# Altium PCB HX-SMJ-03-A.pcbdoc (part 2 of 2)
Units mil, origin at the board's own origin, x right, y up, seen from the top; angles counter-clockwise.
Board outline 10466.23 x 2984.91 mil, 2 copper layers (Top Layer, Bottom Layer); 269 components, 182 nets, 710 pads, 382 vias.
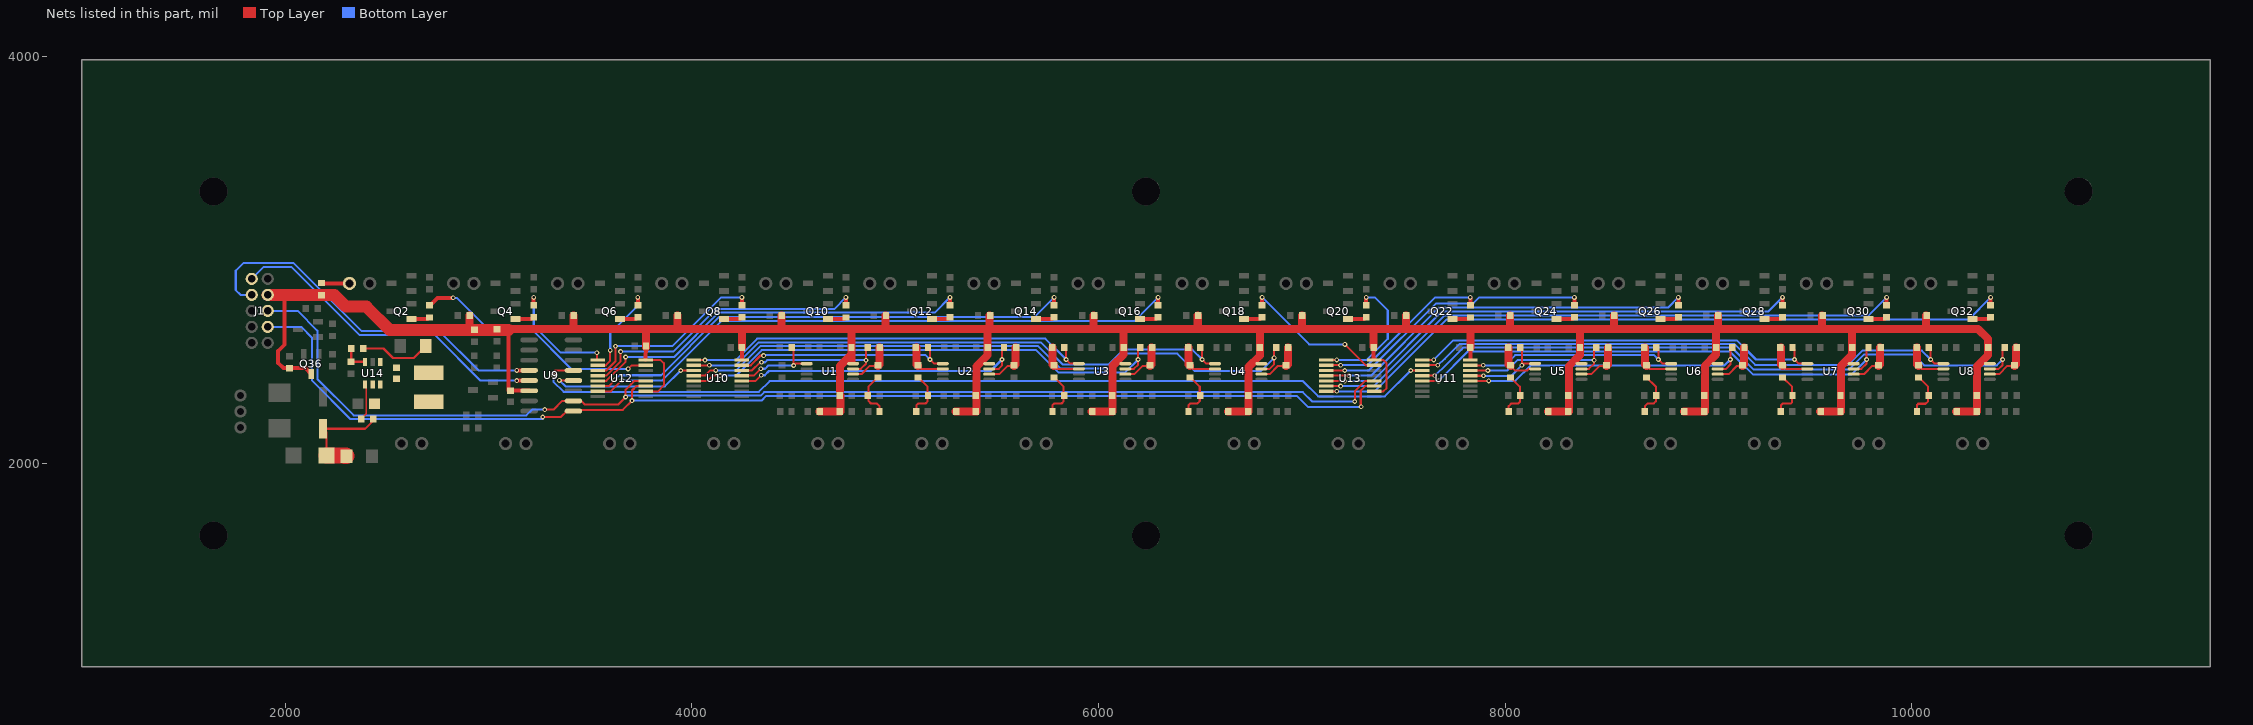
[diagram p2: the nets of this part, all layers, seen from the top]

## Via types
v1: diameter 24, hole 12, Top Layer to Bottom Layer, 370 vias
v2: diameter 27.56, hole 15.75, Top Layer to Bottom Layer, 12 vias

## Nets (pads, with @x,y where several pads share a name; then routed paths per layer and width w, separated by ;. In a path a pad name is that pad's centre, name@x,y a point inside that pad or via, vN(x,y) a via of type N, cw(c..) or ccw(c..) an arc to the next point about the centre after c; other vN are vias at no path point) (continued)
R5_1: C3.1 R5.1 R9.2 | length 227.8
  Top Layer w10: R5.1@4914.73,2425.32 4867.53,2378.12 4867.53,2334.72 4867.53,2308.42 4880.63,2295.32 4908.23,2295.32 4922.63,2280.92 C3.1@4922.59,2256.02
R6_1: R5.2 R6.1 U1.6 | length 237.5
  Top Layer w10: U1.6@4787.73,2440.12 4833.73,2440.12 4874.13,2480.42 R5.2@4914.73,2480.42
  Top Layer w39.37: R5.2@4914.73,2480.42 4922.63,2488.32 R6.1@4922.63,2571.02
R18_2: C6.2 R14.2 R18.2 | length 232.7
  Top Layer w10: C6.2@5103.73,2256.02 5103.73,2286.72 5112.53,2295.52 5148.53,2295.52 5158.83,2305.92 5158.83,2334.82 5158.83,2378.12 R14.2@5111.63,2425.32
R28_2: C10.2 R24.2 R28.2 | length 232.2
  Top Layer w10: C10.2@5773.03,2256.02 5773.03,2286.02 5782.53,2295.52 5817.53,2295.52 5828.13,2306.12 5828.13,2334.72 5828.13,2378.12 R24.2@5780.93,2425.32
R38_2: C14.2 R34.2 R38.2 | length 232
  Top Layer w10: C14.2@6442.28,2256.02 6442.33,2286.32 6451.33,2295.22 6485.93,2295.22 6497.43,2306.72 6497.43,2334.72 6497.43,2378.12 R34.2@6450.23,2425.32
R48_2: C18.2 R44.2 R48.2 | length 232.2
  Top Layer w10: C18.2@8017.13,2256.02 8017.13,2282.82 8029.53,2295.22 8064.53,2295.22 8072.23,2302.92 8072.23,2334.72 8072.23,2378.12 R44.2@8025.03,2425.32
R58_2: C22.2 R54.2 R58.2 | length 229.3
  Top Layer w10: C22.2@8686.38,2256.02 8686.43,2282.12 8700.53,2296.22 8730.53,2296.22 8741.53,2307.22 8741.53,2334.72 8741.53,2378.12 R54.2@8694.23,2425.32
R68_2: C26.2 R64.2 R68.2 | length 234.1
  Top Layer w10: C26.2@9355.63,2256.02 9355.63,2285.42 9365.53,2295.22 9403.53,2295.22 9410.83,2302.52 9410.83,2334.82 9410.83,2378.12 R64.2@9363.53,2425.32
R78_2: C30.2 R74.2 R78.2 | length 232.8
  Top Layer w10: C30.2@10024.98,2256.02 10025.03,2288.12 10031.03,2294.22 10067.03,2294.22 10080.13,2307.32 10080.13,2334.72 10080.13,2378.12 R74.2@10032.83,2425.32
R81_2: D17.1 R81.2 | length 125.9
  Top Layer w19.68: R81.2@2189.63,2886.02 D17.1@2315.54,2885.96
R83_2: Q2.1 R83.2 | length 92.7
  Top Layer w19.68: Q2.1@2621.43,2710.72 2700.23,2710.72 R83.2@2710.03,2720.62
R86_2: Q4.1 R86.2 | length 92.7
  Top Layer w19.68: Q4.1@3133.24,2710.77 3212.03,2710.82 R86.2@3221.83,2720.62
R89_2: Q6.1 R89.2 | length 92.7
  Top Layer w19.68: Q6.1@3645.03,2710.82 3723.83,2710.82 R89.2@3733.63,2720.62
R92_2: Q8.1 R92.2 | length 92.7
  Top Layer w19.68: Q8.1@4156.83,2710.72 4235.63,2710.72 R92.2@4245.43,2720.62
R95_2: Q10.1 R95.2 | length 92.6
  Top Layer w19.68: Q10.1@4668.73,2710.72 4747.43,2710.72 R95.2@4757.23,2720.62
R98_2: Q12.1 R98.2 | length 92.6
  Top Layer w19.68: Q12.1@5180.48,2710.77 5259.23,2710.82 R98.2@5269.03,2720.62
R101_2: Q14.1 R101.2 | length 92.6
  Top Layer w19.68: Q14.1@5692.3,2710.77 5771.03,2710.82 R101.2@5780.93,2720.62
R104_2: Q16.1 R104.2 | length 92.6
  Top Layer w19.68: Q16.1@6204.1,2710.77 6282.83,2710.82 R104.2@6292.73,2720.62
R107_2: Q18.1 R107.2 | length 92.6
  Top Layer w19.68: Q18.1@6715.91,2710.77 6794.63,2710.82 R107.2@6804.53,2720.62
R110_2: Q20.1 R110.2 | length 92.7
  Top Layer w19.68: Q20.1@7227.73,2710.77 7306.53,2710.82 R110.2@7316.33,2720.62
R113_2: Q22.1 R113.2 | length 92.7
  Top Layer w19.68: Q22.1@7739.53,2710.72 7818.33,2710.72 R113.2@7828.13,2720.62
R116_2: Q24.1 R116.2 | length 92.7
  Top Layer w19.68: Q24.1@8251.35,2710.77 8330.13,2710.82 R116.2@8339.93,2720.62
R119_2: Q26.1 R119.2 | length 92.7
  Top Layer w19.68: Q26.1@8763.13,2710.82 8841.93,2710.82 R119.2@8851.73,2720.62
R122_2: Q28.1 R122.2 | length 92.7
  Top Layer w19.68: Q28.1@9274.93,2710.82 9353.73,2710.82 R122.2@9363.53,2720.62
R125_2: Q30.1 R125.2 | length 92.6
  Top Layer w19.68: Q30.1@9786.78,2710.77 9865.53,2710.82 R125.2@9875.33,2720.62
R128_2: Q32.1 R128.2 | length 92.6
  Top Layer w19.68: Q32.1@10298.59,2710.77 10377.33,2710.82 R128.2@10387.23,2720.62
RCLK: J1.5 U9.10 U12.12 U13.12 | length 6112.8
  Top Layer w10: v1(3276.23,2265) 3318.83,2265.02 3361.93,2308.22 U9.10@3417.07,2308.2 ; U9.10@3404.83,2308.22 3455.23,2308.22 3473.03,2290.32 3637.13,2290.32 v1@3674.03,2327.32 ; v1@3674.03,2327.22 3674.03,2363.22 3717.43,2406.62 U12.12@3773.02,2406.63 ; v1@7260.03,2305.22 7260.03,2356.02 7310.63,2406.62 U13.12@7355.69,2406.63
  Bottom Layer w10: J1.5@1913.6,2750.96 2060.23,2751.02 2157.23,2654.02 2157.23,2416.02 2336.23,2237.02 3185.23,2237.02 3213.23,2265.02 v1(3276.23,2265) ; v1(3674.07,2327.26) 3681.08,2334.28 4338.08,2334.28 4355.08,2351.29 7004.08,2351.29 7050.08,2305.28 v1(7260.07,2305.26)
S$68: 
SRCLK: J1.3 U9.9 U12.11 U13.11 | length 6044.5
  Top Layer w10: v1(3266.23,2229) 3354.83,2229.02 3383.93,2258.22 U9.9@3417.07,2258.2 ; U9.9@3417.13,2264.22 3660.03,2264.22 3705.03,2309.22 3705.03,2359.22 3726.83,2381.02 U12.11@3773.02,2381.03 ; v1@7291.03,2279.22 7289.33,2281.02 7289.33,2358.22 7312.13,2381.02 U13.11@7355.69,2381.03
  Bottom Layer w10: J1.3@1913.53,2672.22 2078.03,2672.22 2130.23,2620.02 2130.23,2409.02 2320.23,2219.02 3266.23,2219.02 v1(3266.23,2229) ; v1(3705.07,2309.26) 4342.08,2309.28 4366.08,2333.28 6975.08,2333.28 7029.11,2279.26 v1(7291.07,2279.26)
U2_2: R13.2 R14.1 U2.2 | length 222
  Top Layer w10: R14.1@5111.63,2480.42 5126.33,2465.72 U2.2@5233.64,2465.7
  Top Layer w39.37: R13.2@5103.73,2571.02 5103.73,2488.32 R14.1@5111.63,2480.42
U2_6: R15.2 R16.1 U2.6 | length 232.5
  Top Layer w10: U2.6@5461.98,2440.1 5512.23,2440.12 5552.63,2480.42 R15.2@5584.03,2480.42
  Top Layer w39.37: R15.2@5584.03,2480.42 5591.93,2488.32 R16.1@5591.93,2571.02
U3_2: R23.2 R24.1 U3.2 | length 222
  Top Layer w10: R24.1@5780.93,2480.42 5795.63,2465.72 U3.2@5902.94,2465.69
  Top Layer w39.37: R23.2@5773.03,2571.02 5773.03,2488.32 R24.1@5780.93,2480.42
U3_6: R25.2 R26.1 U3.6 | length 232.6
  Top Layer w10: U3.6@6131.29,2440.09 6176.13,2440.12 6216.43,2480.42 R25.2@6253.33,2480.42
  Top Layer w39.37: R25.2@6253.33,2480.42 6261.23,2488.32 R26.1@6261.23,2571.02
U4_2: R33.2 R34.1 U4.2 | length 222
  Top Layer w10: R34.1@6450.23,2480.42 6464.93,2465.72 U4.2@6572.25,2465.69
  Top Layer w39.37: R33.2@6442.33,2571.02 6442.33,2488.32 R34.1@6450.23,2480.42
U4_6: R35.2 R36.1 U4.6 | length 232.5
  Top Layer w10: U4.6@6800.59,2440.09 6841.93,2440.12 6882.33,2480.42 R35.2@6922.63,2480.42
  Top Layer w39.37: R35.2@6922.63,2480.42 6930.53,2488.32 R36.1@6930.53,2571.02
U5_2: R43.2 R44.1 U5.2 | length 228.1
  Top Layer w10: R44.1@8025.03,2480.52 8047.13,2458.32 8109.03,2458.32 8116.43,2465.72 U5.2@8146.93,2465.72
  Top Layer w39.37: R43.2@8017.13,2571.02 8017.13,2488.32 R44.1@8025.03,2480.42
U5_6: R45.2 R46.1 U5.6 | length 232.2
  Top Layer w10: U5.6@8375.33,2440.12 8422.73,2440.12 8464.73,2480.42 R45.2@8497.43,2480.42
  Top Layer w39.37: R45.2@8497.43,2480.42 8505.33,2488.32 R46.1@8505.33,2571.02
U6_2: R53.2 R54.1 U6.2 | length 222
  Top Layer w10: R54.1@8694.23,2480.42 8709.03,2465.72 U6.2@8816.34,2465.69
  Top Layer w39.37: R53.2@8686.43,2571.02 8686.43,2488.32 R54.1@8694.23,2480.42
U6_6: R55.2 R56.1 U6.6 | length 232.6
  Top Layer w10: U6.6@9044.63,2440.12 9099.33,2440.12 9139.73,2480.42 R55.2@9166.73,2480.42
  Top Layer w39.37: R55.2@9166.73,2480.42 9174.63,2488.32 R56.1@9174.63,2571.02
U7_2: R63.2 R64.1 U7.2 | length 222
  Top Layer w10: R64.1@9363.53,2480.42 9378.33,2465.72 U7.2@9485.6,2465.69
  Top Layer w39.37: R63.2@9355.63,2571.02 9355.63,2488.32 R64.1@9363.53,2480.42
U7_6: R65.2 R66.1 U7.6 | length 232.6
  Top Layer w10: U7.6@9713.93,2440.12 9764.33,2440.12 9804.73,2480.42 R65.2@9836.03,2480.42
  Top Layer w39.37: R65.2@9836.03,2480.42 9843.83,2488.32 R66.1@9843.83,2571.02
U8_2: R73.2 R74.1 U8.2 | length 222
  Top Layer w10: R74.1@10032.83,2480.42 10047.63,2465.72 U8.2@10154.91,2465.68
  Top Layer w39.37: R73.2@10025.03,2571.02 10025.03,2488.32 R74.1@10032.83,2480.42
U8_6: R75.2 R76.1 U8.6 | length 232.6
  Top Layer w10: U8.6@10383.23,2440.12 10429.33,2440.12 10469.73,2480.42 R75.2@10505.33,2480.42
  Top Layer w39.37: R75.2@10505.33,2480.42 10513.23,2488.32 R76.1@10513.23,2571.02
U14_1: C41.1 U14.1
U14_3: R132.2 R133.1 U14.3 | length 135.5
  Top Layer w11.81: R133.1@2324.53,2566.02 2324.53,2504.02 2322.23,2501.62 2323.73,2500.12 U14.3@2391.83,2500.12
U14_4: R131.2 U14.4 | length 188
  Top Layer w7.87: R131.2@2372.53,2219.02 2398.23,2244.62 2398.23,2389.92 U14.4@2391.83,2389.88
U14_6: C41.2 L1.1 U14.6
VCC: C1.1 C5.1 C9.1 C13.1 C17.1 C21.1 C25.1 C29.1 C33.2 C34.2 C35.2 C36.2 C37.2 C38.2 J1.7 L1.2 Q36.3 R1.1 R2.1 R7.2 R11.1 R12.1 R17.2 R21.1 R22.1 R27.2 R31.1 R32.1 R37.2 R41.1 R42.1 R47.2 R51.1 R52.1 R57.2 R61.1 R62.1 R67.2 R71.1 R72.1 R77.2 R81.1 R84.1 R87.1 R90.1 R93.1 R96.1 R99.1 R102.1 R105.1 R108.1 R111.1 R114.1 R117.1 R120.1 R123.1 R126.1 R129.2 R130.2 R133.2 R138.2 U1.8 U2.8 U3.8 U4.8 U5.8 U6.8 U7.8 U8.8 U9.6 U10.16 U11.16 U12.10 U12.16 U13.10 U13.16 | length 16647.2
  Top Layer w10: U12.10@3772.93,2355.52 3833.23,2355.52 3862.13,2384.32 3862.13,2493.32 3846.43,2509.02 U12.16@3772.93,2509.02 ; U13.10@7355.69,2355.45 7400.53,2355.42 7416.33,2371.22 7416.33,2494.22 7401.63,2509.02 U13.16@7355.69,2508.99
  Top Layer w11.81: R133.2@2383.89,2566 2483.23,2566.02 2530.23,2519.02 2631.93,2519.02 C38.2@2690.93,2578
  Top Layer w19.68: 1997.23,2829.72 1997.23,2585.02 1965.23,2553.02 1965.23,2494.02 1989.93,2469.32 R138.2@2020.23,2469.34 2098.73,2469.32 Q36.3@2127.23,2440.8 ; C33.2@3097.03,2359.22 3097.03,2662.72 ; C33.2@3108.03,2358.78 U9.6@3199.03,2358.22 ; U12.16@3772.53,2512.22 C34.2@3773.03,2574.22 ; U10.16@4245.93,2512.02 C36.2@4246.03,2574.22 ; 7355.73,2662.32 7352.83,2659.32 7352.83,2575.02 7352.83,2516.52 U13.16@7356.03,2513.22 ; U11.16@7828.53,2513.22 C37.2@7829.03,2575.22 ; C37.2@7828.63,2571.02 7828.63,2662.32
  Top Layer w39.37: 2892.88,2662.32 3096.83,2662.32 10325.03,2662.32 10375.43,2612.02 C29.1@10375.39,2571.02 10375.43,2533.52 10320.23,2478.42 10320.23,2334.72 10320.23,2256.02 R71.1@10217.93,2256.02 ; 2907.03,2657.62 R84.1@2906.99,2728.52 ; 3416.73,2662.32 R87.1@3416.73,2728.52 ; C34.2@3773.53,2571.02 3773.53,2662.32 ; 3928.53,2662.32 R90.1@3928.53,2728.52 ; C36.2@4245.63,2571.22 4245.63,2662.32 ; 4440.33,2662.32 R93.1@4440.33,2728.52 ; R1.1@4627.33,2256.02 4729.73,2256.02 R7.2@4729.73,2334.72 ; 4728.73,2359.12 4728.73,2479.72 4784.83,2535.82 ; 4784.85,2507.9 4784.85,2535.8 ; 4784.83,2662.32 4784.83,2571.02 4784.83,2535.82 ; 4952.13,2662.32 R96.1@4952.13,2728.52 ; R11.1@5296.63,2256.02 5399.03,2256.02 5399.03,2334.82 5399.03,2478.12 5454.13,2533.12 C5.1@5454.09,2571.02 5454.13,2662.32 ; 5463.93,2662.32 R99.1@5463.93,2728.52 ; R21.1@5965.93,2256.02 6068.33,2256.02 6068.33,2334.72 6068.33,2480.32 6123.43,2535.42 C9.1@6123.39,2571.02 6123.43,2662.32 ; 5975.73,2662.32 R102.1@5975.73,2728.52 ; 6487.63,2662.32 R105.1@6487.63,2728.42 ; R31.1@6635.23,2256.02 6737.53,2256.02 6737.63,2334.72 6737.63,2475.62 6792.73,2530.72 C13.1@6792.69,2571.02 6792.73,2662.32 ; 6989.03,2662.32 6999.43,2672.62 R108.1@6999.43,2728.52 ; C35.2@7352.83,2575.02 7352.83,2648.72 7355.73,2651.72 ; 7511.23,2662.32 R111.1@7511.23,2728.52 ; C37.2@7828.63,2571.02 7828.63,2662.32 ; 8023.03,2662.32 R114.1@8023.03,2728.52 ; R41.1@8210.03,2256.02 8312.43,2256.02 R47.2@8312.43,2334.72 ; R47.2@8312.43,2334.82 8312.43,2478.62 8367.53,2533.72 C17.1@8367.49,2571.02 8367.53,2662.32 ; 8534.83,2662.32 R117.1@8534.83,2728.52 ; R51.1@8879.33,2256.02 8981.63,2256.02 8981.63,2334.72 8981.63,2480.82 9036.83,2536.02 C21.1@9036.79,2571.02 9036.83,2662.32 ; 9046.63,2662.32 R120.1@9046.63,2728.52 ; R61.1@9548.63,2256.02 9650.93,2256.02 R67.2@9650.93,2334.72 ; 9558.43,2662.32 R123.1@9558.43,2728.52 ; R67.2@9650.93,2334.82 9650.93,2479.12 9706.03,2534.22 9706.03,2571.02 9706.03,2662.32 ; 10070.23,2662.32 R126.1@10070.23,2728.52
  Top Layer w59.05: J1.7@1913.6,2829.7 2177.53,2829.72 2178.53,2828.72 2241.43,2828.72 2298.23,2772.02 2398.23,2772.02 2512.53,2657.62 R130.2@2930.23,2657.62 ; 2869.88,2657.62 3096.83,2657.62
VDD: C39.2 C40.2 C42.1 D33.2 R131.1 U14.5 | length 520
  Top Layer w10: D33.2@2202.23,2039 2202.23,2155.22 2186.23,2171.22 2392.73,2171.22 2431.93,2210.42 R131.1@2431.89,2219
  Top Layer w78.74: D33.2@2202.23,2039 2298.53,2039.02 C39.2@2301.53,2036 2299.53,2038.02 C39.2@2292.23,2038.02
X0: R3.1 U1.1 U10.13 | length 436.5
  Top Layer w10: U10.13@4245.43,2432.22 4303.53,2432.22 4337.63,2466.22 v1@4339.03,2466.22 ; R3.1@4489.53,2571.02 4500.03,2560.52 4500.03,2482.22 4509.13,2491.32 U1.1@4564.34,2491.3
  Bottom Layer w10: v1(4339.07,2466.26) 4360.08,2466.29 4376.08,2482.28 v1(4500.07,2482.26)
X01: R83.1 U12.15 | length 1363.3
  Top Layer w10: R83.1@2710.03,2775.72 2749.53,2815.22 v1@2825.03,2815.22 ; v1@3686.03,2465.22 3704.23,2483.42 U12.15@3773.02,2483.4
  Top Layer w19.68: R83.1@2710.03,2775.72 2749.53,2815.22 v1@2825.03,2815.22
  Bottom Layer w10: v1(2825.07,2815.26) 2843.08,2815.28 2989.78,2668.59 3203.78,2668.59 3406.98,2465.28 v1(3686.07,2465.26)
X1: R6.2 U1.7 U10.14 | length 789.8
  Top Layer w10: U10.14@4245.43,2457.82 4294.63,2457.82 4335.03,2498.22 v1@4342.03,2498.22 ; U1.7@4792.63,2465.72 4830.23,2465.72 4856.03,2491.52 4856.03,2508.22 4856.03,2559.52 R6.2@4867.53,2571.02
  Bottom Layer w10: v1(4342.07,2498.26) 4360.08,2498.28 4370.08,2508.28 v1(4856.07,2508.26)
X02: R86.1 U12.1 | length 583.5
  Top Layer w10: v1@3532.03,2545.22 3532.03,2513.72 U12.1@3536.8,2508.99
  Top Layer w19.68: R86.1@3221.83,2775.72 v1@3221.83,2817.02
  Bottom Layer w10: v1@3221.89,2817.08 3221.89,2678.49 3355.08,2545.28 v1(3532.07,2545.26)
  other v1: 3221.84,2817.07
X2: R13.1 U2.1 U10.15 | length 1090.3
  Top Layer w10: U10.15@4245.43,2483.42 4289.23,2483.42 4337.13,2531.32 v1(4352.07,2531.26) ; R13.1@5158.83,2571.02 5170.63,2559.22 5170.63,2511.92 5191.33,2491.32 U2.1@5233.64,2491.3
  Bottom Layer w10: v1(4352.07,2531.26) 4354.07,2533.26 5149.35,2533.26 v1@5170.66,2511.95
  other v1: 5170.65,2511.95
X03: R89.1 U12.2 | length 479.5
  Top Layer w10: U12.2@3536.8,2483.4 3576.23,2483.42 3598.03,2505.22 v1@3598.03,2556.22
  Top Layer w19.68: R89.1@3733.63,2775.72 v1@3733.63,2817.02
  Bottom Layer w10: v1(3598.07,2556.26) 3598.08,2640.28 3733.68,2775.89 v1(3733.65,2817.07)
X3: R16.2 U2.7 U10.12 | length 1486.8
  Top Layer w10: U10.12@4245.43,2406.62 4313.43,2406.62 v1@4341.03,2434.22 ; U2.7@5461.98,2465.7 5509.03,2465.72 5524.63,2481.22 5525.03,2511.92 5525.03,2559.12 R16.2@5536.83,2571.02
  Bottom Layer w10: v1(4341.07,2434.26) 4358.08,2434.28 4379.08,2455.28 5468.28,2455.28 v1(5524.98,2511.95)
X04: R92.1 U12.3 | length 941.4
  Top Layer w10: U12.3@3536.8,2457.81 3577.63,2457.82 3624.03,2504.22 v1@3624.03,2577.22
  Top Layer w19.68: R92.1@4245.43,2775.72 v1@4245.43,2817.02
  Bottom Layer w10: v1(3624.07,2577.26) 3904.08,2577.28 4143.88,2817.08 v1(4245.47,2817.07)
X4: R23.1 U3.1 U10.1 | length 2052.1
  Top Layer w10: U10.1@4009.24,2508.99 v1@4064.03,2509.02 ; R23.1@5828.13,2571.02 5839.93,2559.22 v1(5839.94,2511.94) 5860.63,2491.32 U3.1@5902.94,2491.29
  Bottom Layer w10: v1(4064.07,2508.99) 4215.81,2508.99 4321.07,2614.26 5737.62,2614.26 v1(5839.94,2511.94)
X05: R95.1 U12.4 | length 1449.2
  Top Layer w10: U12.4@3536.8,2432.22 3579.03,2432.22 3649.03,2502.22 v1@3649.03,2550.22
  Top Layer w19.68: R95.1@4757.23,2775.72 v1@4757.23,2817.02
  Bottom Layer w10: v1(3649.07,2550.26) 3908.08,2550.28 4119.08,2761.29 4701.48,2761.29 v1(4757.28,2817.07)
X5: R26.2 U3.7 U10.5 | length 2481.2
  Top Layer w10: U10.5@4009.24,2406.63 4076.43,2406.62 4102.03,2432.22 v1@4138.03,2432.22 ; U3.7@6131.29,2465.69 6172.93,2465.72 6194.23,2487.02 6194.23,2511.92 6194.23,2559.12 R26.2@6206.13,2571.02
  Bottom Layer w10: v1(4138.07,2432.26) 4216.61,2432.26 4342.61,2558.26 5693.07,2558.26 5804.07,2447.26 6129.58,2447.26 v1@6194.27,2511.95
  other v1: 6194.27,2511.95
X06: R98.1 U12.5 | length 1957.1
  Top Layer w10: U12.5@3536.73,2406.62 3579.43,2406.62 3674.03,2501.32 v1@3674.03,2524.32
  Top Layer w19.68: R98.1@5269.03,2775.72 v1@5269.03,2817.02
  Bottom Layer w10: v1(3674.07,2524.26) 3912.08,2524.28 4130.08,2742.28 5194.28,2742.28 v1(5269.08,2817.07)
X6: R33.1 U4.1 U10.2 | length 2778.5
  Top Layer w10: U10.2@4009.24,2483.4 v1@4086.03,2483.42 ; R33.1@6497.43,2571.02 6509.23,2559.22 6509.23,2511.92 6529.93,2491.32 U4.1@6572.25,2491.29
  Bottom Layer w10: v1(4086.07,2483.4) 4216.18,2483.39 4329.08,2596.29 5715.08,2596.29 5825.08,2486.29 6048.28,2486.29 6122.28,2560.28 6460.98,2560.28 v1@6509.28,2511.98
  other v1: 6509.23,2511.95
X07: R101.1 U12.6 | length 2466
  Top Layer w10: U12.6@3536.73,2381.02 3589.83,2381.02 v1@3621.03,2412.22
  Top Layer w19.68: R101.1@5780.93,2775.72 v1@5780.93,2817.02
  Bottom Layer w10: v1(3621.07,2412.26) 3643.07,2434.26 ; 3643.08,2434.28 3848.08,2434.28 4135.08,2721.29 5685.08,2721.29 v1(5780.89,2817.08)
X7: R36.2 U4.7 U10.4 | length 3212.7
  Top Layer w10: U10.4@4009.24,2432.22 4064.03,2432.22 4090.03,2458.22 v1@4117.03,2458.22 ; U4.7@6800.59,2465.69 6840.83,2465.72 6863.53,2488.52 6863.53,2511.92 6863.53,2559.12 R36.2@6875.43,2571.02
  Bottom Layer w10: v1(4117.07,2458.26) 4217.07,2458.26 4336.07,2577.26 5703.07,2577.26 5813.07,2467.26 6065.07,2467.26 6138.07,2540.26 6387.07,2540.26 6473.07,2454.26 6798.01,2454.26 v1(6863.56,2519.82)
X8: R43.1 U5.1 U11.13 | length 435.4
  Top Layer w10: U11.13@7828.14,2432.22 7828.53,2431.82 v1@7893.03,2431.82 ; R43.1@8072.23,2571.02 8082.03,2561.12 v1@8082.03,2483.22 ; v1(8082.07,2483.26) 8090.03,2491.32 U5.1@8146.93,2491.32
  Bottom Layer w10: v1(7893.07,2431.8) 8030.61,2431.79 v1(8082.07,2483.26)
X08: R104.1 U12.7 | length 2988.4
  Top Layer w10: U12.7@3536.73,2355.52 3601.23,2355.52 v1@3655.03,2409.32
  Top Layer w19.68: R104.1@6292.73,2775.72 v1@6292.73,2817.02
  Bottom Layer w10: v1(3655.07,2409.26) 3854.08,2409.28 4147.08,2702.28 6177.88,2702.28 v1(6292.7,2817.07)
X9: R46.2 U5.7 U11.14 | length 787
  Top Layer w10: U11.14@7828.14,2457.81 v1@7914.43,2457.82 ; U5.7@8375.33,2465.72 8410.93,2465.72 8437.03,2491.82 8437.03,2508.22 8437.03,2557.82 R46.2@8450.23,2571.02
  Bottom Layer w10: v1(7914.46,2457.81) 8009.48,2457.78 8059.98,2508.28 v1(8437.07,2508.26)
X09: R107.1 U13.15 | length 730.7
  Top Layer w10: v1@7211.33,2586.22 7314.23,2483.42 U13.15@7355.69,2483.4
  Top Layer w19.68: R107.1@6804.53,2775.72 v1@6804.53,2817.02
  Bottom Layer w10: v1(6804.51,2817.08) 7035.33,2586.25 v1(7211.33,2586.26)
X10: R53.1 U6.1 U11.15 | length 1090.2
  Top Layer w10: U11.15@7828.14,2483.4 v1@7892.03,2483.42 ; R53.1@8741.53,2571.02 8753.33,2559.22 8753.33,2511.92 8774.03,2491.32 U6.1@8816.34,2491.29
  Bottom Layer w10: v1(7892.07,2483.4) 7999.18,2483.39 8049.08,2533.28 8732.08,2533.28 v1@8753.39,2511.98
  other v1: 8753.34,2511.95
X010: R110.1 U13.1 | length 659
  Top Layer w10: U13.1@7119.43,2509.02 v1(7171.33,2509.8)
  Top Layer w19.68: R110.1@7316.33,2775.72 v1(7316.32,2817.08)
  Bottom Layer w10: v1@7171.38,2509.78 7318.58,2509.78 7422.08,2613.28 7422.08,2753.18 7358.18,2817.08 v1(7316.32,2817.08)
X11: R56.2 U6.7 U11.12 | length 1483.7
  Top Layer w10: U11.12@7828.14,2406.63 v1@7919.03,2406.62 ; U6.7@9044.63,2465.72 9085.93,2465.72 9107.63,2487.42 9107.63,2511.92 9107.63,2559.12 R56.2@9119.53,2571.02
  Bottom Layer w10: v1(7919.07,2406.63) 8049.28,2406.59 8124.98,2482.28 9077.98,2482.28 v1(9107.67,2511.95)
X011: R113.1 U13.2 | length 888.2
  Top Layer w10: U13.2@7119.43,2483.42 7119.83,2483.82 v1(7190.33,2483.8)
  Top Layer w19.68: R113.1@7828.13,2775.72 v1@7828.13,2817.02
  Bottom Layer w10: v1(7190.33,2483.8) 7322.6,2483.79 7655.9,2817.08 v1(7828.13,2817.08)
X12: R63.1 U7.1 U11.1 | length 2045.1
  Top Layer w10: U11.1@7591.91,2508.99 v1@7648.03,2509.82 ; R63.1@9410.83,2571.02 9422.63,2559.12 9422.63,2511.92 9443.23,2491.32 U7.1@9485.6,2491.29
  Bottom Layer w10: v1(7648.07,2509.8) 7744.57,2606.29 9139.08,2606.29 9233.39,2511.98 v1(9422.62,2511.95)
X012: R116.1 U13.3 | length 1410.8
  Top Layer w10: U13.3@7119.43,2457.82 U13.3@7119.47,2457.81 v1(7210.33,2457.8)
  Top Layer w19.68: R116.1@8339.93,2775.72 v1(8339.94,2817.08)
  Bottom Layer w10: v1(7210.33,2457.8) 7329.58,2457.78 7660.08,2788.28 7843.08,2788.28 7871.89,2817.08 v1@8339.98,2817.08
X13: R66.2 U7.7 U11.5 | length 2637.8
  Top Layer w10: U11.5@7591.91,2406.63 7592.03,2406.82 v1@7672.03,2406.82 ; U7.7@9713.93,2465.72 9751.93,2465.72 9776.93,2490.72 9776.93,2511.92 9776.93,2559.22 R66.2@9788.73,2571.02
  Bottom Layer w10: v1(7672.07,2406.8) 7783.07,2517.79 ; v1(7672.07,2406.8) 7816.58,2551.29 9105.08,2551.29 9218.08,2438.28 9703.28,2438.28 v1(9776.95,2511.95)
X013: R119.1 U13.4 | length 1933.2
  Top Layer w10: U13.4@7119.43,2432.22 7120.03,2432.82 v1(7231.33,2432.8)
  Top Layer w19.68: R119.1@8851.73,2775.72 v1@8851.73,2817.12
  Bottom Layer w10: v1(7231.33,2432.8) 7339.61,2432.79 7675.07,2768.26 8802.95,2768.26 v1(8851.75,2817.08)
X14: R73.1 U8.1 U11.2 | length 2767.6
  Top Layer w10: U11.2@7591.91,2483.4 7592.33,2483.82 v1@7668.03,2483.82 ; R73.1@10080.13,2571.02 10091.93,2559.22 10091.93,2511.92 10112.53,2491.32 U8.1@10154.91,2491.28
  Bottom Layer w10: v1(7668.07,2483.8) 7702.58,2515.18 7775.68,2588.28 9126.08,2588.28 9229.08,2485.28 9686.08,2485.28 9756.08,2555.28 10048.58,2555.28 v1(10091.91,2511.95)
X014: R122.1 U13.5 | length 2451.6
  Top Layer w10: U13.5@7119.43,2406.62 v1@7206.33,2406.62
  Top Layer w19.68: R122.1@9363.53,2775.72 v1@9363.53,2817.12
  Bottom Layer w10: v1(7210.34,2406.63) 7347.44,2406.63 7689.07,2748.26 9294.76,2748.26 v1(9363.56,2817.08)
X15: R76.2 U8.7 U11.4 | length 3182.6
  Top Layer w10: U11.4@7591.91,2432.22 7592.53,2432.82 v1@7653.03,2432.82 ; U8.7@10383.23,2465.72 10426.93,2465.72 10446.23,2484.92 10446.23,2511.92 10446.23,2559.12 R76.2@10458.03,2571.02
  Bottom Layer w10: v1(7653.07,2432.8) 7712.48,2489.28 7793.39,2570.28 9115.08,2570.28 9223.08,2462.28 9690.08,2462.28 9765.08,2537.28 10006.08,2537.28 10060.08,2483.28 10417.58,2483.28 v1@10446.28,2511.98
  other v1: 10446.24,2511.95
X015: R125.1 U13.6 | length 2977.7
  Top Layer w10: U13.6@7119.43,2381.02 v1@7190.03,2381.32
  Top Layer w19.68: R125.1@9875.33,2775.72 v1(9875.38,2817.08)
  Bottom Layer w10: v1@7190.33,2381.04 7352.86,2381.04 7699.07,2727.26 9785.56,2727.26 v1(9875.38,2817.08)
  other v1: 7190.07,2381.26
X016: R128.1 U13.7 | length 3504.4
  Top Layer w10: U13.7@7119.43,2355.42 v1@7175.33,2355.42
  Top Layer w19.68: R128.1@10387.23,2775.72 v1(10387.19,2817.08)
  Bottom Layer w10: v1@7171.33,2355.45 7357.24,2355.45 7710.06,2708.26 10278.35,2708.26 v1(10387.19,2817.08)
  other v1: 7171.33,2355.45
X_IN1: U9.12 U10.3 | length 775.6
  Top Layer w10: v1@3348.03,2409.22 3416.03,2409.22 U9.12@3417.03,2408.22 ; v1@3945.03,2457.82 U10.3@4009.24,2457.81
  Bottom Layer w10: v1(3348.07,2409.26) 3378.07,2379.26 3866.52,2379.26 v1(3945.07,2457.81)
X_IN2: U9.13 U11.3 | length 4549.5
  Top Layer w10: v1(3318.23,2433) 3318.23,2449.42 3327.03,2458.22 U9.13@3417.07,2458.2 ; v1@7535.03,2457.82 U11.3@7591.91,2457.81
  Bottom Layer w10: v1(3318.23,2433) 3318.23,2403.13 3369.08,2352.28 4329.08,2352.28 4382.08,2405.28 7005.08,2405.28 7080.08,2330.28 7407.58,2330.28 v1(7535.07,2457.8)
X_IN3: J1.8 U9.4 | length 1861
  Top Layer w19.68: v1@3138.03,2458.22 U9.4@3199.03,2458.22
  Bottom Layer w10: J1.8@1834.83,2829.72 1779.53,2829.72 1756.23,2853.02 1756.23,2949.02 1793.23,2986.02 2041.23,2986.02 2376.23,2651.02 2757.23,2651.02 2950.03,2458.22 v1@3138.03,2458.22
  other v1: 3138.07,2458.18
X_IN4: J1.10 U9.5 | length 1621.9
  Top Layer w19.68: v1@3136.03,2408.22 U9.5@3199.03,2408.22
  Bottom Layer w10: J1.10@1834.83,2908.52 1893.33,2967.02 2030.23,2967.02 2364.23,2633.02 2735.23,2633.02 2960.03,2408.22 v1@3138.03,2408.22
  other v1: 3138.07,2408.18
pads on no net: U9.7 U13.9

## Polygon pours and split planes (outlines as drawn)
GND on Bottom Layer (solid): 1509.23,1508 1509.23,3476 10958.23,3476 10958.23,1508
GND on Top Layer (solid): 1509.23,1508 1509.23,3476 10958.23,3476 10958.23,1508

## Keep-outs
Keep-Out Layer:
  lines w10: 1509.23,1645.8 ccw(c1647.03,1645.8) 1647.03,1508 ; 1509.23,3338.71 cw(c1647.03,3338.71) 1647.03,3476.5 ; 10820.25,1508 ccw(c10820.25,1645.8) 10958.05,1645.8 ; 10820.25,3476.5 cw(c10820.25,3338.71) 10958.05,3338.71

## Other copper
Top Layer:
  drawing of 638 lines, arcs and shapes, not listed
Bottom Layer:
  region net LEVELOUT: 2245.21,2583.26 2232.47,2595.98 2241.24,2599.1 2248.31,2592.03
  region net LEDOUT: 2933.17,2294 2933.17,2312 2941.57,2308 2941.57,2298
  region net LEVELOUT: 2859.17,2327 2859.17,2345 2867.57,2341 2867.57,2331
  region net LEVELOUT: 2842.23,2343.94 2860.23,2343.94 2856.23,2352.34 2846.23,2352.34
  region net LEDOUT: 3266.29,2294 3266.29,2312 3257.89,2308 3257.89,2298
  region net OUT: 2047.23,2532.06 2065.23,2532.06 2066.07,2523.66 2046.39,2523.66
  region net X8: 8082.83,2471.29 8070.09,2484.01 8066.99,2475.24 8074.06,2468.17
  region net X9: 8429.15,2517.27 8429.12,2499.27 8420.73,2503.28 8420.74,2513.28
  region net X10: 8754.13,2523.93 8741.36,2511.24 8738.28,2520.02 8745.37,2527.07
  region net X11: 9108.41,2499.97 9095.7,2512.72 9092.58,2503.95 9099.64,2496.87
  region net X12: 9414.7,2520.97 9414.67,2502.97 9406.28,2506.98 9406.3,2516.98
  region net X13: 9777.7,2499.98 9764.97,2512.7 9761.86,2503.94 9768.93,2496.86
  region net X14: 10092.66,2523.93 10079.93,2511.2 10076.82,2519.97 10083.9,2527.04
  region net X15: 10447,2499.98 10434.26,2512.7 10431.16,2503.93 10438.23,2496.86
  region net D16_2: 10417.47,2244.06 10404.73,2256.77 10401.63,2248 10408.7,2240.94
  region net D15_2: 10122.2,2244.07 10109.46,2256.79 10106.36,2248.02 10113.43,2240.95
  region net D14_2: 9748.18,2244.07 9735.45,2256.79 9732.34,2248.02 9739.41,2240.95
  region net D13_2: 9444.24,2247.01 9444.18,2265.01 9435.8,2260.98 9435.83,2250.98
  region net D12_2: 9078.89,2244.07 9066.15,2256.79 9063.05,2248.02 9070.12,2240.95
  region net D11_2: 8783.61,2244.06 8770.88,2256.78 8767.77,2248.01 8774.84,2240.94
  region net D10_2: 8409.6,2244.06 8396.86,2256.78 8393.76,2248.01 8400.83,2240.94
  region net D9_2: 8105.63,2247.03 8105.62,2265.03 8097.22,2261.02 8097.23,2251.02
  region net IN_U6: 8820.32,2387.09 8820.31,2369.09 8828.71,2373.08 8828.72,2383.08
  region net IN_U8: 10379.26,2369.09 10379.25,2387.09 10370.85,2383.08 10370.85,2373.08
  region net IN_U8: 10158.9,2387.09 10158.9,2369.09 10167.3,2373.08 10167.3,2383.08
  region net IN_U7: 9706,2369.09 9705.99,2387.09 9697.59,2383.08 9697.6,2373.08
  region net IN_U7: 9494.49,2387.09 9494.48,2369.09 9502.88,2373.08 9502.89,2383.08
  region net IN_U5: 8152.21,2388.42 8152.2,2367.75 8161.85,2373.08 8161.86,2383.08
  region net IN_U5: 8370.2,2367.75 8370.19,2388.42 8360.55,2383.08 8360.55,2373.08
  region net IN_U6: 9040.68,2369.09 9040.67,2387.09 9032.27,2383.08 9032.28,2373.08
  region net X09: 6816.49,2817.83 6803.76,2805.1 6812.52,2801.99 6819.6,2809.06
  region net X08: 6293.44,2805.09 6280.73,2817.84 6277.6,2809.08 6284.66,2801.99
  region net X07: 5781.64,2805.1 5768.91,2817.84 5765.8,2809.07 5772.87,2802
  region net X06: 5269.83,2805.09 5257.11,2817.83 5253.99,2809.07 5261.06,2801.99
  region net X05: 4758.03,2805.09 4745.31,2817.83 4742.19,2809.06 4749.26,2801.99
  region net X04: 4237.54,2826.08 4237.53,2808.08 4229.13,2812.08 4229.14,2822.08
  region net X03: 3742.66,2809.15 3724.66,2809.12 3728.68,2800.73 3738.68,2800.74
  region net X02: 3230.86,2809.16 3212.86,2809.11 3216.89,2800.72 3226.89,2800.75
  region net X01: 2833.02,2806.27 2833,2824.27 2841.4,2820.28 2841.42,2810.28
  region net X1: 4848.15,2517.27 4848.12,2499.27 4839.73,2503.28 4839.74,2513.28
  region net C2_1: 4531.74,2238.35 4517.13,2252.96 4514.08,2242.37 4521.15,2235.3
  region net R2_2: 4827.03,2238.35 4812.41,2252.96 4809.36,2242.37 4816.43,2235.3
  region net IN_U1: 4569.53,2388.42 4569.52,2367.75 4579.17,2373.08 4579.17,2383.08
  region net IN_U1: 4787.52,2367.75 4787.51,2388.42 4777.87,2383.08 4777.87,2373.08
  region net D4_2: 5496.34,2238.35 5481.7,2252.94 5478.67,2242.34 5485.75,2235.28
  region net D3_2: 5201.06,2238.35 5186.43,2252.96 5183.39,2242.36 5190.46,2235.29
  region net D6_2: 6165.61,2238.35 6150.99,2252.96 6147.94,2242.37 6155.02,2235.3
  region net D5_2: 5870.34,2238.35 5855.72,2252.96 5852.67,2242.37 5859.75,2235.3
  region net D8_2: 6824.94,2241.76 6824.91,2262.43 6815.27,2257.08 6815.28,2247.08
  region net D7_2: 6529.66,2241.76 6529.64,2262.43 6520,2257.08 6520.01,2247.08
  region net IN_U2: 5458,2369.09 5457.99,2387.09 5449.59,2383.08 5449.59,2373.08
  region net IN_U2: 5237.64,2387.09 5237.63,2369.09 5246.03,2373.08 5246.04,2383.08
  region net X0: 4492.14,2491.27 4492.12,2473.27 4483.73,2477.28 4483.74,2487.28
  region net X2: 5171.4,2523.93 5158.67,2511.2 5155.56,2519.97 5162.63,2527.04
  region net X3: 5525.72,2499.97 5513.01,2512.72 5509.88,2503.96 5516.94,2496.88
  region net X4: 5840.69,2523.92 5827.97,2511.19 5824.85,2519.95 5831.92,2527.03
  region net X5: 6195.03,2499.98 6182.29,2512.7 6179.19,2503.93 6186.26,2496.86
  region net X6: 6510.02,2523.93 6497.25,2511.24 6494.17,2520.02 6501.27,2527.07
  region net X7: 6864.32,2507.85 6851.58,2520.57 6848.48,2511.8 6855.55,2504.73
  region net IN_U3: 6127.29,2369.09 6127.28,2387.09 6118.88,2383.08 6118.89,2373.08
  region net IN_U3: 5906.94,2387.09 5906.93,2369.09 5915.33,2373.08 5915.34,2383.08
  region net IN_U4: 6576.23,2387.09 6576.22,2369.09 6584.63,2373.08 6584.63,2383.08
  region net IN_U4: 6796.58,2369.09 6796.57,2387.09 6788.17,2383.08 6788.18,2373.08
  region net X11: 7927.03,2415.61 7926.98,2397.61 7935.39,2401.59 7935.42,2411.59
  region net X8: 7901.02,2440.8 7901,2422.8 7909.41,2426.79 7909.41,2436.79
  region net X9: 7922.41,2466.8 7922.38,2448.8 7930.79,2452.78 7930.8,2462.78
  region net X10: 7900.02,2492.39 7900,2474.39 7908.4,2478.38 7908.41,2488.38
  region net X13: 7684.05,2406.04 7671.34,2418.78 7680.11,2421.88 7687.17,2414.8
  region net X13: 7684.05,2406.04 7671.33,2418.78 7680.1,2421.89 7687.16,2414.81
  region net X15: 7665.03,2431.74 7652.63,2444.79 7661.48,2447.68 7668.36,2440.42
  region net X_IN2: 7535.84,2445.83 7523.09,2458.54 7519.99,2449.77 7527.07,2442.7
  region net X14: 7680,2482.48 7667.9,2495.8 7676.8,2498.49 7683.53,2491.09
  region net X12: 7660.05,2509.04 7647.33,2521.78 7656.1,2524.88 7663.16,2517.81
  region net X016: 10387.93,2805.1 10375.21,2817.84 10372.1,2809.07 10379.16,2802
  region net X015: 9876.14,2805.1 9863.41,2817.83 9860.3,2809.06 9867.37,2801.99
  region net X014: 9364.32,2805.11 9351.58,2817.82 9348.48,2809.05 9355.56,2801.99
  region net X013: 8852.51,2805.11 8839.77,2817.82 8836.67,2809.05 8843.75,2801.98
  region net X012: 8332.01,2808.08 8332,2826.08 8323.61,2822.08 8323.6,2812.08
  region net X011: 7820.2,2808.08 7820.19,2826.08 7811.79,2822.08 7811.79,2812.08
  region net X010: 7324.26,2808.08 7324.26,2826.08 7332.66,2822.08 7332.66,2812.08
  region net X010: 7179.28,2518.79 7179.26,2500.79 7187.66,2504.78 7187.67,2514.78
  region net X011: 7198.28,2492.8 7198.26,2474.8 7206.67,2478.79 7206.67,2488.79
  region net X012: 7218.28,2466.79 7218.26,2448.79 7226.67,2452.78 7226.68,2462.78
  region net X013: 7239.27,2441.8 7239.26,2423.8 7247.66,2427.79 7247.67,2437.79
  region net X014: 7218.28,2397.63 7218.28,2415.63 7226.68,2411.63 7226.68,2401.63
  region net X015: 7198.13,2390.15 7197.88,2372.15 7206.34,2376.04 7206.47,2386.04
  region net X09: 7203.4,2577.26 7203.39,2595.26 7194.99,2591.25 7195,2581.25
  region net QD2: 7200.41,2560.27 7200.38,2542.27 7191.99,2546.29 7192,2556.29
  region net RCLK: 7252.14,2314.27 7252.12,2296.27 7243.73,2300.28 7243.74,2310.28
  region net SRCLK: 7283.14,2270.26 7283.13,2288.26 7274.73,2284.25 7274.74,2274.25
  region net A: 7582.14,2243.26 7582.13,2261.26 7573.73,2257.25 7573.73,2247.25
  region net B: 7609.14,2217.26 7609.13,2235.26 7600.73,2231.25 7600.74,2221.25
  region net C: 7585.71,2190.79 7584.6,2208.76 7576.46,2204.25 7577.08,2194.25
  region net QD2: 3914.02,2368.27 3914,2386.27 3922.4,2382.28 3922.41,2372.28
  region net RCLK: 3685.1,2322.55 3677.37,2338.8 3686.44,2339.28 3691.2,2329.28
  region net SRCLK: 3713.02,2300.27 3712.99,2318.27 3721.4,2314.28 3721.41,2304.28
  region net A: 4370.05,2282.51 4357.32,2295.24 4366.09,2298.35 4373.16,2291.28
  region net A: 4350.16,2274.24 4350.11,2292.24 4341.72,2288.22 4341.75,2278.22
  region net B: 4322.15,2248.24 4322.11,2266.24 4313.72,2262.22 4313.74,2252.22
  region net B: 4338.01,2266.26 4338,2248.26 4346.4,2252.25 4346.41,2262.25
  region net C: 4309.01,2241.26 4309,2223.26 4317.41,2227.25 4317.41,2237.25
  region net C: 4293.15,2223.24 4293.11,2241.24 4284.72,2237.22 4284.75,2227.22
  region net X3: 4349.02,2425.27 4349,2443.27 4357.4,2439.28 4357.41,2429.28
  region net X0: 4347.02,2457.27 4346.99,2475.27 4355.4,2471.29 4355.41,2461.29
  region net X1: 4350.02,2489.27 4350,2507.27 4358.4,2503.28 4358.42,2493.28
  region net X2: 4361.05,2523.3 4358.85,2541.16 4367.67,2538.26 4368.9,2528.26
  region net X5: 4146.01,2441.26 4146.01,2423.26 4154.41,2427.25 4154.41,2437.25
  region net X7: 4125.01,2467.26 4125,2449.26 4133.41,2453.26 4133.41,2463.26
  region net X6: 4094.02,2492.39 4094,2474.39 4102.4,2478.38 4102.41,2488.38
  region net X4: 4072.01,2500 4072,2518 4080.41,2513.99 4080.4,2503.99
  region net X08: 3663.02,2400.27 3662.99,2418.27 3671.4,2414.28 3671.41,2404.28
  region net X07: 3633.05,2411.51 3620.32,2424.24 3629.09,2427.35 3636.16,2420.27
  region net X06: 3682.02,2515.27 3681.99,2533.27 3690.4,2529.28 3690.41,2519.28
  region net X05: 3657.02,2541.27 3656.99,2559.27 3665.4,2555.28 3665.41,2545.28
  region net X04: 3632.02,2568.27 3631.99,2586.27 3640.4,2582.28 3640.41,2572.28
  region net X03: 3607.07,2564.2 3589.07,2564.2 3593.08,2572.6 3603.08,2572.6
  region net X02: 3524.15,2554.27 3524.12,2536.27 3515.73,2540.28 3515.74,2550.28
  region net X01: 3678.15,2474.27 3678.12,2456.27 3669.73,2460.28 3669.74,2470.28
  region net X_IN2: 3309.23,2425.06 3327.23,2425.06 3323.23,2416.66 3313.23,2416.66
  region net A: 3130.16,2599.24 3130.11,2617.24 3121.72,2613.22 3121.75,2603.22
  region net A: 3146.04,2599.29 3145.98,2617.29 3154.39,2613.32 3154.43,2603.32
  region net B: 3130.14,2549.22 3130.14,2567.22 3121.74,2563.22 3121.74,2553.22
  region net B: 3146.01,2549.22 3146.01,2567.22 3154.41,2563.22 3154.41,2553.22
  region net C: 3146.03,2499.2 3145.99,2517.2 3154.4,2513.22 3154.42,2503.22
  region net C: 3130.16,2517.2 3130.11,2499.2 3121.72,2503.22 3121.75,2513.22
  region net X_IN3: 3130.16,2467.2 3130.11,2449.2 3121.72,2453.22 3121.75,2463.22
  region net X_IN4: 3130.16,2417.2 3130.11,2399.2 3121.72,2403.22 3121.75,2413.22
  region net X_IN1: 3945.82,2445.83 3933.09,2458.56 3929.98,2449.79 3937.06,2442.72
  region net X_IN1: 3360.05,2410.01 3347.31,2397.29 3356.08,2394.17 3363.16,2401.24
  region net SRCLK: 3265.45,2217.03 3254.45,2231.28 3249.44,2224.02 3257.16,2214.02
  region net RCLK: 3268.31,2274.01 3268.28,2256.01 3259.89,2260.02 3259.9,2270.02
  region net QD1: 3836.84,2493.24 3824.09,2480.53 3820.99,2489.3 3828.07,2496.36
  region net QD1: 3516.43,2612.12 3507.47,2596.51 3516.66,2595.64 3521.82,2604.62
  region net LEVELOUT: 3260.29,2327 3260.29,2345 3251.89,2341 3251.89,2331
  region net QD3: 3299.23,2288.06 3317.23,2288.06 3313.23,2279.66 3303.23,2279.66
  region net D13_2: 8834.71,2074.19 8834.67,2122.94 8857.43,2103.59 8857.44,2093.59
  region net D7_2: 5740.25,2130.98 5774.76,2096.55 5777.11,2126.34 5770.03,2133.41
  region net D11_2: 7811.05,2074.18 7811.05,2122.93 7833.8,2103.55 7833.8,2093.55
  region net D6_2: 5252.01,2074.19 5251.98,2122.94 5274.74,2103.59 5274.75,2093.59
  region net D8_2: 6252.05,2130.98 6286.56,2096.56 6288.91,2126.35 6281.83,2133.41
  region net D3_2: 3693.03,2130.99 3727.52,2096.53 3729.89,2126.32 3722.81,2133.39
  region net D9_2: 6787.46,2074.21 6787.39,2122.96 6810.17,2103.62 6810.18,2093.62
  region net D15_2: 9858.3,2074.18 9858.3,2122.93 9881.05,2103.55 9881.05,2093.55
  region net D5_2: 4716.64,2130.99 4751.13,2096.54 4753.5,2126.33 4746.42,2133.39
  region net D12_2: 8299.32,2130.99 8333.8,2096.52 8336.18,2126.31 8329.11,2133.38
  region net D14_2: 9346.49,2074.18 9346.49,2122.93 9369.24,2103.55 9369.24,2093.55
  region net R2_2: 3204.77,2074.19 3204.73,2122.94 3227.5,2103.59 3227.5,2093.59
  region net D10_2: 7299.24,2074.18 7299.24,2122.93 7321.99,2103.55 7321.99,2093.55
  region net D4_2: 4228.41,2074.19 4228.37,2122.94 4251.13,2103.59 4251.14,2093.59
  region net D16_2: 10372.98,2120.04 10324.23,2120.04 10343.6,2142.79 10353.6,2142.79
  region net C2_1: 2669.38,2130.99 2703.88,2096.54 2706.25,2126.33 2699.17,2133.39
  region net OUT: 1799.14,2278.58 1799.07,2233.58 1820.09,2246.2 1820.12,2265.89
  region net A: 1815.03,2616 1814.99,2571 1794.01,2588.52 1794.02,2598.52
  region net B: 1815.03,2694.7 1814.99,2649.7 1794.01,2667.22 1794.02,2677.22
  region net SRCLK: 1933.42,2649.7 1933.38,2694.7 1954.39,2677.22 1954.4,2667.22
  region net QD3: 1933.42,2571 1933.38,2616 1954.39,2598.52 1954.4,2588.52
  region net RCLK: 1933.47,2728.49 1933.41,2773.49 1954.43,2756.02 1954.44,2746.02
  region net C: 1815.04,2773.49 1814.98,2728.49 1794.01,2746.02 1794.02,2756.02
  region net X_IN3: 1815.02,2852.22 1815,2807.22 1794.01,2824.72 1794.01,2834.72
  region net X_IN4: 1832.92,2938.38 1864.8,2906.62 1867.23,2933.85 1860.14,2940.91
  pour cut-out: 10673.23,1792 10966.23,1792 10966.23,1500 10673.23,1500
  pour cut-out: 10673.23,3484.91 10966.23,3484.91 10966.23,3192.91 10673.23,3192.91
  pour cut-out: 6086.61,3484.91 6379.61,3484.91 6379.61,3192.91 6086.61,3192.91
  pour cut-out: 6086.61,1792 6379.61,1792 6379.61,1500 6086.61,1500
  pour cut-out: 1500,1792 1793,1792 1793,1500 1500,1500
  pour cut-out: 1500,3484.91 1793,3484.91 1793,3192.91 1500,3192.91
  pour cut-out: 2794.23,2250 2794.23,2502 2793.23,2503 2618.23,2503 2617.23,2502 2617.23,2250

## Silkscreen, mask and mechanical layers (free items; w line width, h text height)
Top Overlay:
  circle w10: c10820.26,1645.8 r137.8
  circle w10: c10820.26,3338.71 r137.8
  circle w10: c6233.64,3338.71 r137.8
  circle w10: c6233.64,1645.8 r137.8
  circle w10: c1647.03,3338.71 r137.8
  circle w10: c1647.03,1645.8 r137.8
  text "DGND" at 2005.48,2988 h31.5 r270
  text "S4" at 1947.48,2934 h31.5 r270
  text "S5" at 1950.48,2855 h31.5 r270
  text "5V" at 2003.48,2855 h31.5 r270
  text "S1" at 2003.48,2783 h31.5 r270
  text "S6" at 1948.48,2777 h31.5 r270
  text "S2" at 2002.48,2728 h31.5 r270
  text "S7" at 1953.48,2699 h31.5 r270
  text "S3" at 2007.48,2624 h31.5 r270
  text "S8" at 1952.48,2622 h31.5 r270
  text "DGND" at 1815.11,2433.55 h31.5 r270
  text "SIG" at 1816.75,2284.1 h31.5 r270
  text "24V" at 1819.75,2191.1 h31.5 r270
  text "HX-SMJ03-A" at 5278.03,1671.81 h78.74
  text "20211019" at 6490.99,1661.32 h78.74
Document:
  lines w0.1: 6232.11,2491.45 6234.11,2493.45